# EAGLE board SWARMESH (EAGLE 9.4.2)
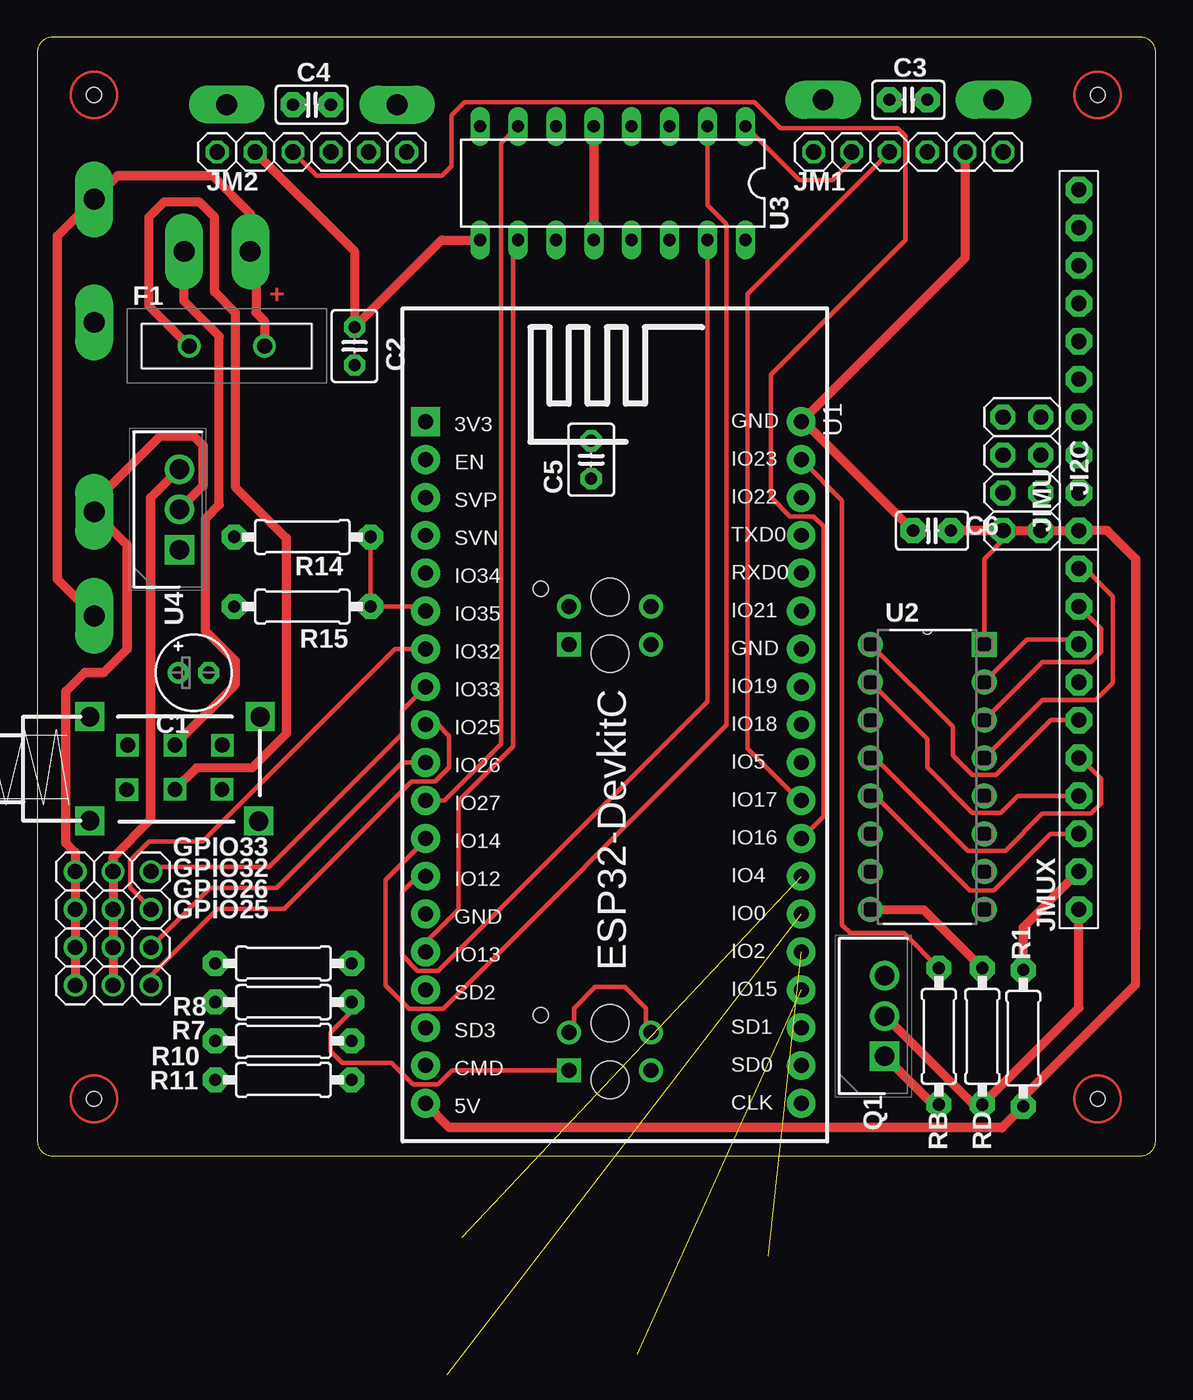
[diagram p0: board, top side]
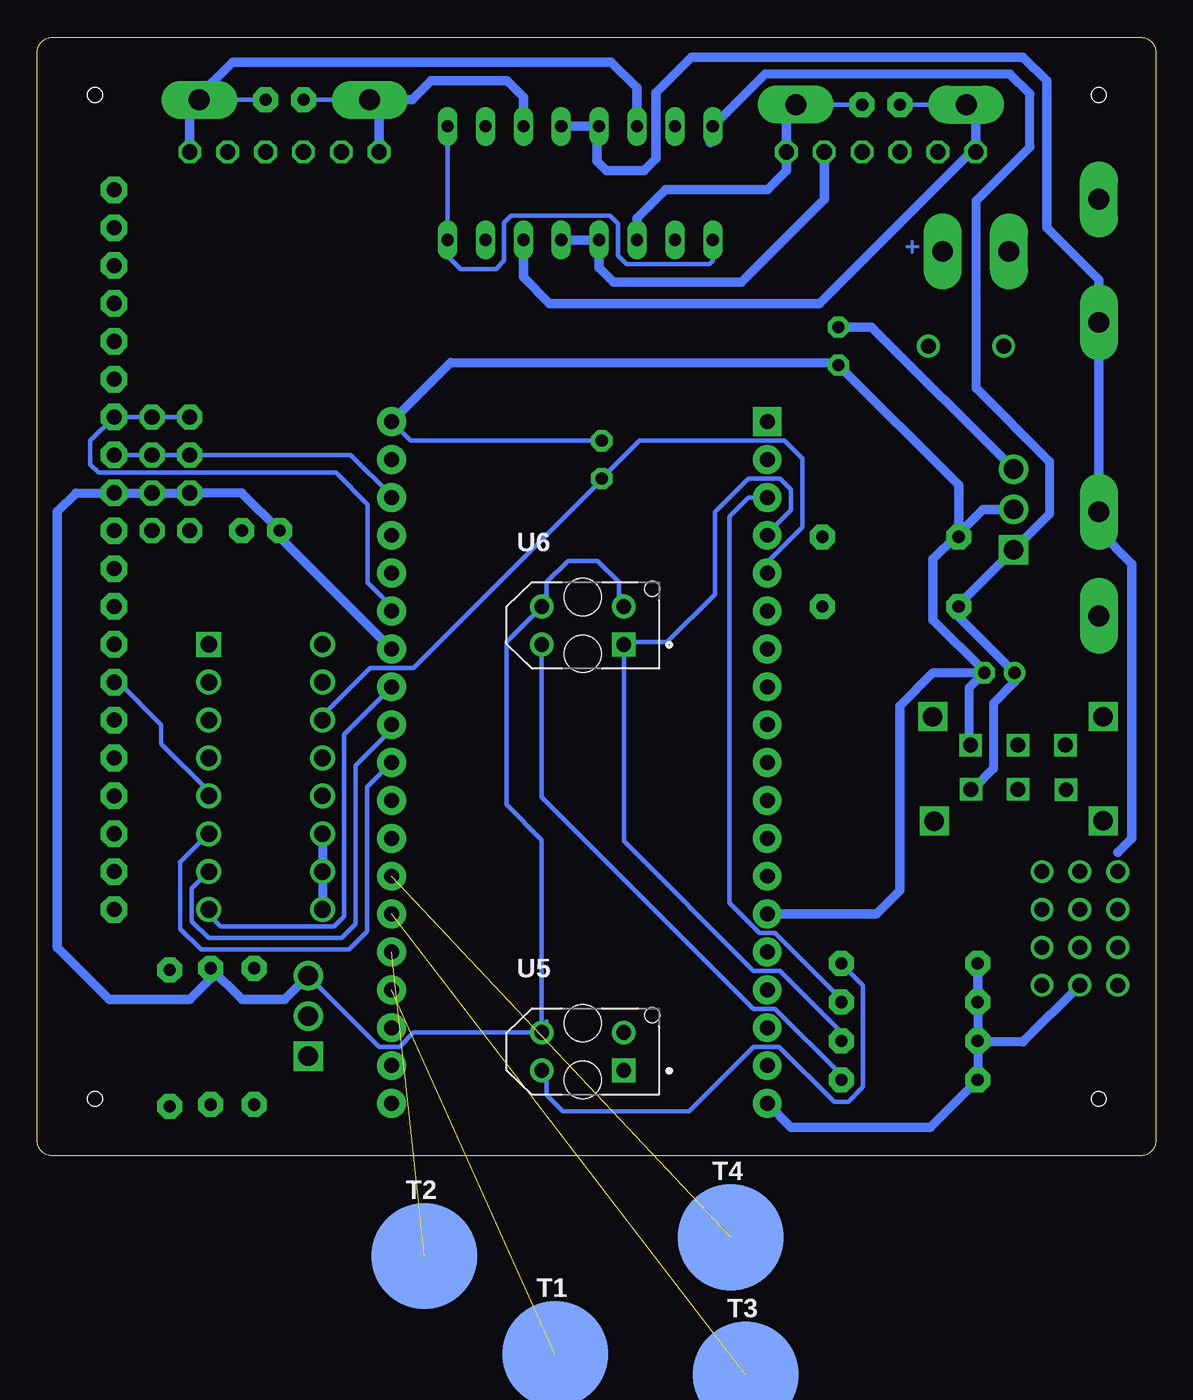
[diagram p1: board, bottom side, seen from below]

Size 75 x 75 mm. Coordinates in mm from the lower left corner, seen from the top.
Outline: 0,74 0,1 arc90 1,0 74,0 arc90 75,1 75,74 arc90 74,75 1,75 arc90 0,74
Copper layers (1*16): Top 0.035mm / dielectric 1.5mm / Bottom 0.035mm
Design rules "default *": minimum track width 6mil, minimum drill 0.35mm, track to track 6mil, track to pad 6mil, pad to pad 6mil, via to via 6mil, smd to smd 6mil, copper to edge 40mil, drill to drill 6mil, minimum pad ring 10mil, minimum via ring 8mil, stop-mask expansion 4mil, vias tented up to drill 0mil, thermal gap 10mil
Holes 1 mm at 3.81,3.81 71.12,3.81 71.12,71.12 3.81,71.12
tKeepout: area 0.9,0.9 to 6.7,6.7; area 68.3,1 to 74,6.6; area 0.9,68.2 to 6.7,74; area 68.2,68.2 to 74,74

## Footprints (pad centres in the part's own frame; a part is rotated, then mirrored left to right if it is on the bottom)
1X1-BIGPOGO = drill 1.4 pad 2.54 long: P$1 0,0
E2-5 = drill 0.813 pad 1.422: + -1.016,0 | drill 0.813 pad 1.422 octagon: - 1.016,0
C025-030X050 = drill 0.813 pad 1.422 octagon: 1 -1.27,0; 2 1.27,0
C025-025X050 = drill 0.813 pad 1.676 octagon: 1 -1.27,0; 2 1.27,0
RUEF300K2 = drill 1.01 pad 1.515: 1 0,0; 2 5.05,0
1X03 = drill 1.016: 1 -2.54,0; 2 0,0; 3 2.54,0
2X04 = drill 1.016 pad 1.676 octagon: 1 -3.81,-1.27; 2 -3.81,1.27; 3 -1.27,-1.27; 4 -1.27,1.27; 5 1.27,-1.27; 6 1.27,1.27; 7 3.81,-1.27; 8 3.81,1.27
1X10-BIG = drill 1.016 pad 1.778 octagon: 1 -11.43,0; 2 -8.89,0; 3 -6.35,0; 4 -3.81,0; 5 -1.27,0; 6 1.27,0; 7 3.81,0; 8 6.35,0; 9 8.89,0; 10 11.43,0
1X06 = drill 1.016 octagon: 1 -6.35,0; 2 -3.81,0; 3 -1.27,0; 4 1.27,0; 5 3.81,0; 6 6.35,0
TO270P460X1020X2008-3P = drill 1.32 pad 1.98 square: 1 0,0 | drill 1.32 pad 1.98: 2 2.7,0; 3 5.4,0
0207/9 = drill 0.813 pad 1.676 octagon: 1 -4.572,0; 2 4.572,0
PS22F03 = drill 1.3 square: 0 -3.175,5.715; 1 3.835,5.613; 2 3.81,-5.715; 3 -3.175,-5.715 | drill 1 square: C1 -1.27,0; C2 1.702,0; NC1 -1.27,-3.175; NC2 1.727,-3.226; NO1 -1.27,3.175; NO2 1.702,3.15
SPRING-CONNECTOR = smd 7.112 x 7.112: P$2 0,0
ESP32-DEVKITC = drill 1 pad 1.93 square: 1 -0.01,0.01 | drill 1 pad 1.93: 2 2.53,0.01; 3 5.07,0.01; 4 7.61,0.01; 5 10.15,0.01; 6 12.69,0.01; 7 15.23,0.01; 8 17.77,0.01; 9 20.31,0.01; 10 22.85,0.01; 11 25.39,0.01; 12 27.93,0.01; 13 30.47,0.01; 14 33.01,0.01; 15 35.55,0.01; 16 38.09,0.01; 17 40.63,0.01; 18 43.17,0.01; 19 45.71,0.01; 20 45.71,25.2; 21 43.17,25.2; 22 40.63,25.2; 23 38.09,25.2; 24 35.55,25.2; 25 33.01,25.2; 26 30.47,25.2; 27 27.93,25.2; 28 25.39,25.2; 29 22.85,25.2; 30 20.31,25.2; 31 17.77,25.2; 32 15.23,25.2; 33 12.69,25.2; 34 10.15,25.2; 35 7.61,25.2; 36 5.07,25.2; 37 2.53,25.2; 38 -0.01,25.2
CD4051BEE4DIP = drill 1.118: 1 -3.81,8.89; 2 -3.81,6.35; 3 -3.81,3.81; 4 -3.81,1.27; 5 -3.81,-1.27; 6 -3.81,-3.81; 7 -3.81,-6.35; 8 -3.81,-8.89; 9 3.81,-8.89; 10 3.81,-6.35; 11 3.81,-3.81; 12 3.81,-1.27; 13 3.81,1.27; 14 3.81,3.81; 15 3.81,6.35 | drill 1.118 square: 16 3.81,8.89
DIL16 = drill 0.813 long: 1 -8.89,-3.81; 2 -6.35,-3.81; 3 -3.81,-3.81; 4 -1.27,-3.81; 5 1.27,-3.81; 6 3.81,-3.81; 7 6.35,-3.81; 8 8.89,-3.81; 9 8.89,3.81; 10 6.35,3.81; 11 3.81,3.81; 12 1.27,3.81; 13 -1.27,3.81; 14 -3.81,3.81; 15 -6.35,3.81; 16 -8.89,3.81
XDCR_TCRT5000L = drill 1 pad 1.6 square: 1 -2.75,1.27 | drill 1 pad 1.6: 2 -2.75,-1.27; 3 2.75,-1.27; 4 2.75,1.27 | hole 2.5: 0,1.9; 0,-1.9 | hole 1: -4.65,-2.45

## Placement (x,y rotation side)
BAT+  [1X1-BIGPOGO]  3.81,64.14 90 top
BAT-  [1X1-BIGPOGO]  9.84,60.64 90 top
C1  10uF  [E2-5]  10.48,32.38 0 top
C2  [C025-030X050]  21.27,54.29 270 top
C3  [C025-025X050]  58.42,70.8 0 top
C4  [C025-025X050]  18.41,70.48 0 top
C5  [C025-030X050]  37.15,46.67 90 top
C6  [C025-025X050]  60.01,41.91 180 top
CHG1+  [1X1-BIGPOGO]  3.81,36.2 270 top
CHG1-  [1X1-BIGPOGO]  3.81,43.18 270 top
CHG2+  [1X1-BIGPOGO]  14.29,60.64 270 bottom
CHG2-  [1X1-BIGPOGO]  3.81,55.88 270 top
F1  RUEF300K-2  [RUEF300K2]  15.24,54.29 180 top
GPIO25  [1X03]  5.08,11.43 180 top
GPIO26  [1X03]  5.08,13.97 180 top
GPIO32  [1X03]  5.08,16.51 180 top
GPIO33  [1X03]  5.08,19.05 180 top
JI2C  [2X04]  66.04,45.72 90 top
JIMU  PINHD-1X10  [1X10-BIG]  69.85,53.34 90 top
JM1  [1X06]  58.42,67.31 0 top
JM2  [1X06]  18.41,67.31 0 top
JMUX  PINHD-1X10  [1X10-BIG]  69.85,27.94 270 top
JP1  [1X1-BIGPOGO]  52.7,70.8 180 top
JP2  [1X1-BIGPOGO]  64.14,70.8 180 top
JP3  [1X1-BIGPOGO]  24.13,70.48 0 top
JP4  [1X1-BIGPOGO]  12.7,70.48 180 top
Q1  TIP122  [TO270P460X1020X2008-3P]  56.83,6.67 90 top
R1  220  [0207/9]  66.12,7.88 270 top
R7  1k  [0207/9]  16.51,10.3 0 top
R8  100  [0207/9]  16.51,12.9 180 top
R10  1k  [0207/9]  16.51,7.69 0 top
R11  100  [0207/9]  16.51,5.08 180 top
R14  10k  [0207/9]  17.78,41.5 0 top
R15  47k  [0207/9]  17.78,36.83 180 top
RB  1k  [0207/9]  60.46,8 90 top
RD  0  [0207/9]  63.37,8 90 top
S1  [PS22F03]  9.23,26.27 270 top
T1  [SPRING-CONNECTOR]  40.27,-13.31 0 bottom  (outside the outline)
T2  [SPRING-CONNECTOR]  49.03,-6.74 0 bottom  (outside the outline)
T3  [SPRING-CONNECTOR]  27.49,-14.68 0 bottom  (outside the outline)
T4  [SPRING-CONNECTOR]  28.49,-5.47 0 bottom  (outside the outline)
U1  ESP32DEVKITC  [ESP32-DEVKITC]  26.04,49.21 270 top
U2  CD4051BEE4  [CD4051BEE4DIP]  59.69,25.4 0 top
U3  L293D  [DIL16]  38.59,65.22 180 top
U4  L7805CV-DG  [TO270P460X1020X2008-3P]  9.53,40.64 90 top
U5  TCRT5000L  [XDCR_TCRT5000L]  38.42,6.99 180 bottom
U6  TCRT5000L  [XDCR_TCRT5000L]  38.42,35.56 180 bottom

## Library data of the parts
BAT+ BAT- C1-C6 CHG1+ CHG1- CHG2+ CHG2- GPIO25 GPIO26 GPIO32 GPIO33 JI2C JIMU JM1 JM2 JMUX JP1-JP4 R1 R7 R8 R10 R11 R14 R15 RB RD = adafruit
F1 = RUEF300K-2; DESCRIPTION: TE CONNECTIVITY / RAYCHEM - RUEF300K-2 - RESETTABLE FUSE, PTC, 30V, 3A, RADIAL; HEIGHT: 16.5mm; MANUFACTURER_NAME: TE CONNECTIVITY / RAYCHEM; MANUFACTURER_PART_NUMBER: RUEF300K-2
Q1 = TIP122; DESCRIPTION: TIP122, Darlington Transistor, NPN 8 A 100 V HFE:1000, 3-Pin, TO-220; HEIGHT: 4.6mm; MANUFACTURER_NAME: STMicroelectronics; MANUFACTURER_PART_NUMBER: TIP122; MOUSER_PART_NUMBER: 511-TIP122; MOUSER_PRICE-STOCK: https://www.mouser.com/Search/Refine.aspx?Keyword=511-TIP122
S1 = ArduinoNano LearningBot 4-21-18
T1-T4 = SparkFun-Connectors; SF_ID: PRT-11822
U1 = ESP32-DEVKITC (1)
U2 = CD4051BEE4
U3 = st-microelectronics; MPN: L293D; OC_FARNELL: 9589619; OC_NEWARK: 56P8249
U4 = L7805CV-DG; ALLIED_NUMBER: 70390055; ALLIED_PRICE-STOCK: http://www.alliedelec.com/stmicroelectronics-l7805cv-dg/70390055/; DESCRIPTION: Voltage Regulator 5V 4% 1.5A TO220 L7805CV-DG, Linear Voltage Regulator, Current Limit, Shut-Down 1.5A 5 V, 3-Pin TO220; HEIGHT: 4.6mm; MANUFACTURER_NAME: STMicroelectronics; MANUFACTURER_PART_NUMBER: L7805CV-DG; MOUSER_PART_NUMBER: 511-L7805CV-DG; MOUSER_PRICE-STOCK: https://www.mouser.com/Search/Refine.aspx?Keyword=511-L7805CV-DG; RS_PART_NUMBER: 7931346P; RS_PRICE-STOCK: http://uk.rs-online.com/web/p/products/7931346P
U5 U6 = TCRT5000L; AVAILABILITY: Unavailable; DESCRIPTION: TCRT5000 Series 940 nm 100 mA 60 mA Transistor Output Reflective Optical Sensor; MF: Vishay Semiconductor; MP: TCRT5000L; PACKAGE: PCB Mount Vishay; PRICE: None

## Nets
ADCMX: C5.1 U1.5 U2.3
ADO: JIMU.7
BATLVL: R14.2 R15.1 U1.6
E1A: JM1.3 U1.28
E1B: JM1.4
E2A: JM2.3 U1.27
E2B: JM2.4
ECL: JIMU.6
EDA: JIMU.5
FSY: JIMU.10
GND: C1.- C2.2 C5.2 C6.2 CHG1-.P$1 CHG2-.P$1 GPIO25.3 GPIO26.3 GPIO32.3 GPIO33.3 JI2C.3 JI2C.4 JIMU.2 JM1.5 JM2.5 Q1.3 R14.1 RD.2 S1.NO1 U1.14 U1.32 U1.38 U2.6 U2.7 U2.8 U3.4 U3.5 U3.12 U3.13 U4.2 U5.2 U5.3 U6.2 U6.3
INT: JIMU.8
IO5: U1.29 U2.11
IO12: U1.13 U3.15
IO13: U1.15 U3.10
IO14: U1.12 U3.2
IO25: GPIO25.1 U1.9
IO26: GPIO26.1 U1.10
IO27: U1.11 U3.7
IO32: GPIO32.1 U1.7
IO33: GPIO33.1 U1.8
IR1: R7.2 U1.3 U5.1
IR2: R10.2 U1.4 U6.1
IRTX: RB.2 U1.37
M1A: C3.1 JM1.1 JP1.P$1 U3.3
M1B: C3.2 JM1.6 JP2.P$1 U3.6
M2A: C4.1 JM2.1 JP4.P$1 U3.14
M2B: C4.2 JM2.6 JP3.P$1 U3.11
N$1: Q1.1 RB.1
N$2: F1.2 S1.C2
N$3: BAT-.P$1 S1.C1
N$5: JMUX.6 U2.4
N$7: U1.30 U2.10
N$8: U1.31 U2.9
N$9: R11.1 U6.4
N$10: R8.1 U5.4
N$11: JMUX.5 U2.1
N$13: JMUX.7 U2.2
N$14: JMUX.8 U2.5
N$15: BAT+.P$1 CHG1+.P$1 CHG2+.P$1 F1.1
N$16: JMUX.9 R1.1
N$17: JMUX.10 Q1.2 RD.1
N$19: JMUX.1 U2.13
N$20: JMUX.2 U2.14
N$21: JMUX.4 U2.12
N$22: JMUX.3 U2.15
NCS: JIMU.9
SCL: JI2C.5 JI2C.6 JIMU.3 U1.36
SDA: JI2C.7 JI2C.8 JIMU.4 U1.33
TOUCH1: T1.P$2 U1.23
TOUCH2: T2.P$2 U1.24
TOUCH3: T3.P$2 U1.25
TOUCH4: T4.P$2 U1.26
V+: C1.+ R15.2 S1.NO2 U3.8 U4.1
VCC: C2.1 C6.1 GPIO25.2 GPIO26.2 GPIO32.2 GPIO33.2 JI2C.1 JI2C.2 JIMU.1 JM1.2 JM2.2 R1.2 R7.1 R8.2 R10.1 R11.2 U1.19 U2.16 U3.1 U3.9 U3.16 U4.3

## Tracks (layer width: path | path; a pad name or v marks a point on that pad's centre or on a via)
ADCMX
  Bottom 0.305: U2.3 55.88,29.53 52.7,32.71 49.76,32.71 37.15,45.32 C5.1 34.6,47.95 24.88,47.95 23.68,46.75 23.68,42.17 26.05,39.81 U1.5
BATLVL
  Top 0.305: R14.2 R15.1 25.74,36.83 U1.6
E1A
  Top 0.305: U1.28 51.12,23.82 47.62,27.32 47.62,57.78 JM1.3
E2A
  Top 0.305: JM2.3 18.73,65.73 27.15,65.73 27.78,66.36 27.78,69.77 28.66,70.65 48.09,70.65 49.83,68.91 57.69,68.91 58.22,68.39 58.22,61.38 49.2,52.37 49.2,44.16 50.49,42.87 50.71,42.87 52.06,42.87 52.7,42.23 52.7,22.86 52.7,22.75 U1.27
GND
  Top 0.305: 41.15,36.84 U6.3 | 35.68,36.84 U6.2 | U5.2 36,8.59 36,9.89 37.42,11.3 39.42,11.3 40.84,9.89 40.84,8.59 U5.3
  Top 0.61: C6.2 51.42,49.22 U1.38 62.23,60.22 JM1.5 | U2.8 59.43,16.51 RD.2 | 2.54,20.32 GPIO33.3 GPIO32.3 GPIO26.3 GPIO25.3
  Top 0.635: U3.5 U3.12 | U4.2 11.11,44.93 11.11,47.62 10.48,48.26 8.26,48.26 3.81,43.81 CHG1-.P$1 6.03,40.96 6.03,33.97 4.45,32.38 3.17,32.38 1.91,31.11 1.91,20.95 2.54,20.32
  Bottom 0.305: U5.3 41.27,8.26 | 41.27,8.26 41.59,8.26 40.84,9.01 | 41.15,8.3 41.23,8.3 41.27,8.26 | 35.68,8.27 U5.2 36,8.59 | U6.2 36,37.16 36,38.46 37.42,39.88 39.42,39.88 40.84,38.46 40.84,37.16 U6.3 41.17,36.8 43.54,34.43 43.54,23.56 41.17,21.18 U5.3 | U1.38 49.97,47.95 37.16,47.95 C5.2 | 56.82,12.07 Q1.3 52.08,7.31 50.71,7.31 49.77,8.26 U5.3
  Bottom 0.61: 17.14,30.16 14.92,32.38 C1.- | C1.- 12.51,31.37 12.51,27.64 S1.NO1 | U1.32 58.74,41.48 C6.2 61.28,44.45 JI2C.4 JI2C.3 JIMU.2 72.39,44.45 | U1.38 47.27,53.19 21.43,53.19 C2.2 | 14.92,35.92 11.49,32.5 C1.- | U2.6 U2.7 U2.8
  Bottom 0.635: Q1.3 58.42,10.48 61.27,10.48 RD.2 63.37,11.88 64.77,10.48 70.17,10.48 73.66,13.97 73.66,43.18 72.39,44.45 | U1.14 18.74,16.2 17.14,17.8 17.14,30.16 | U3.4 37.47,69.03 | 37.47,69.03 U3.5 | U3.13 U3.12 37.32,59.55 36.35,58.57 27.79,58.57 22.23,64.14 JM2.5 | U4.2 11.59,43.34 13.21,41.72 R14.1 | R14.1 13.21,44.96 C2.2 | 14.92,35.92 14.92,40.01 13.43,41.5 R14.1 | 2.54,20.32 1.59,21.27 1.59,39.69 3.81,41.91 CHG1-.P$1 CHG2-.P$1 3.81,58.74 7.3,62.23 7.3,72.07 8.89,73.66 31.11,73.66 33.5,71.27 33.5,66.85 34.31,66.04 36.83,66.04 37.47,66.67 37.47,69.03
  pour Bottom: 54.29,16.51
IO5
  Bottom 0.305: U1.29 52.87,24.73 52.87,15.02 54.08,13.82 64.02,13.82 65.42,15.21 65.42,19.7 63.53,21.59 U2.11
IO12
  Top 0.305: U3.15 44.94,30.44 35.82,21.33 35.66,21.17 26.89,12.39 25.52,12.39 24.46,13.45 24.46,17.68 25.52,18.74 U1.13
IO13
  Top 0.305: U1.15 26.05,14.3 28.26,16.51 28.26,23.78 31.92,27.45 31.92,61.09 U3.10
IO14
  Top 0.305: U3.2 44.94,63.75 46.22,62.47 46.22,28.87 27.21,9.85 24.94,9.85 23.36,11.43 23.36,18.49 26.05,21.17 U1.12
IO25
  Top 0.305: GPIO25.1 7.62,12.06 12.1,16.55 16.57,16.55 25.12,25.09 26.69,25.09 27.63,26.04 27.63,28.16 26.89,28.9 U1.9
IO26
  Top 0.305: GPIO26.1 11.61,17.96 16.06,17.96 24.47,26.36 U1.10
IO27
  Top 0.305: U3.7 31.11,67.9 31.11,27.62 27.3,23.81 U1.11
IO32
  Top 0.305: GPIO32.1 7.62,16.59 6.24,17.97 6.24,19.81 7.5,21.07 11.1,21.07 24.01,33.98 U1.7
IO33
  Top 0.305: GPIO33.1 7.94,19.37 15.56,19.37 24.46,28.27 24.46,29.86 U1.8
IR1
  Top 0.305: R7.2 21.08,9.66 19.68,8.26 19.68,6.99 20.44,6.22 23.75,6.22 25.2,4.77 26.89,4.77 27.83,5.71 U5.1
  Bottom 0.305: R7.2 21.08,10.5 25.52,14.93 26.57,14.93 28.57,16.94 28.57,42.86 27.3,44.14 U1.3
IR2
  Bottom 0.305: R10.2 21.08,8.27 25.2,12.39 26.96,12.39 35.67,21.1 U6.1 35.52,34.44 32.76,34.44 29.56,37.64 29.56,43.16 27.31,45.41 25.2,45.41 24.46,44.67 24.46,43.3 26.05,41.71 U1.4
IRTX
  Top 0.305: U1.37 53.98,43.94 53.98,15.49 54.54,14.92 58.11,14.92 RB.2
M1A
  Bottom 0.305: C3.1 JP1.P$1
  Bottom 0.635: JM1.1 52.07,70.17 JP1.P$1 49.85,70.8 48.58,72.07 43.5,72.07 42.4,70.97 U3.3
M1B
  Bottom 0.305: 64.45,70.8 C3.2
  Bottom 0.635: U3.6 34.78,71.61 36.51,73.34 61.91,73.34 64.45,70.8 JP2.P$1 64.77,70.17 JM1.6
M2A
  Bottom 0.305: C4.1 JP4.P$1
  Bottom 0.635: JP4.P$1 12.06,69.85 JM2.1 12.38,67.31 22.54,57.15 40.64,57.15 42.4,58.91 U3.14
M2B
  Bottom 0.305: JP3.P$1 C4.2
  Bottom 0.635: 25.08,67.63 JM2.6 | U3.11 34.78,62.87 32.88,64.77 26.04,64.77 24.77,66.04 JM2.6 | JM2.6 24.77,69.85 JP3.P$1
N$1
  Top 0.61: RB.1 60.07,3.43 Q1.1
N$2
  Top 0.61: F1.2 7.48,56.99 7.48,62.95 8.49,63.96 10.88,63.96 11.89,62.95 11.89,57.93 13.28,56.54 13.28,44.84 16.7,41.43 16.7,28.28 14.43,26.01 10.67,26.01 S1.C2
N$3
  Top 0.61: BAT-.P$1 9.84,57.31 12.21,54.95 12.21,43.65 11.29,42.74 11.29,35.19 13.3,33.19 13.3,31.61 S1.C1
N$5
  Top 0.305: U2.4 56.17,26.67 62.39,20.45 64.93,20.45 67.42,22.94 70.66,22.94 71.36,23.64 71.36,25.26 69.95,26.67 JMUX.6
N$7
  Bottom 0.305: U1.30 51.23,28.59 53.65,26.18 53.65,15.53 54.58,14.59 63.52,14.59 64.64,15.72 64.64,17.91 U2.10
N$8
  Bottom 0.305: U1.31 54.42,28.26 54.42,16.04 55.09,15.37 62.7,15.37 63.5,16.16 U2.9
N$9
  Bottom 0.305: R11.1 21.08,5.42 25.52,9.85 26.97,9.85 41.17,24.05 U6.4
N$10
  Bottom 0.305: U5.4 40.84,5.38 40.84,4.08 39.74,2.98 31.29,2.98 26.96,7.31 25.25,7.31 21.55,3.62 20.61,3.62 19.62,4.61 19.62,11.4 21.08,12.87 R8.1
N$11
  Top 0.305: JMUX.5 67.97,29.21 64.29,25.53 62.71,25.53 61.4,26.83 61.4,28.77 U2.1
N$13
  Top 0.305: U2.2 59.68,27.95 59.68,26.02 62.71,22.99 64.61,22.99 65.75,24.13 JMUX.7
N$14
  Top 0.305: JMUX.8 67.94,21.59 64.14,17.78 62.55,17.78 56.2,24.13 U2.5
N$15
  Top 0.61: 14.29,63.18 CHG2+.P$1 15.24,59.69 14.99,59.44 14.95,59.44 14.68,59.17 14.68,56.54 15.24,55.97 F1.1
  Top 0.635: 14.29,63.18 11.75,65.72 5.4,65.72 BAT+.P$1 1.33,61.66 1.33,38.67 CHG1+.P$1
N$16
  Top 0.61: R1.1 66.12,15.32 JMUX.9
N$17
  Top 0.61: JMUX.10 69.85,9.91 RD.1 62.77,3.43 Q1.2
N$19
  Top 0.305: U2.13 67.39,30.56 70.98,30.56 72.14,31.71 72.14,37.5 70.27,39.37 JMUX.1
N$20
  Top 0.305: JMUX.2 71.36,35.32 71.36,33.8 70.66,33.1 68.58,33.1 67.39,33.1 U2.14
N$21
  Bottom 0.305: U2.12 63.5,24.45 66.67,27.62 66.67,28.89 69.53,31.75 JMUX.4
N$22
  Top 0.305: U2.15 66.36,34.61 70.17,34.61 70.48,34.29 JMUX.3
SCL
  Bottom 0.305: U1.36 51.23,44.25 53.98,46.99 JI2C.6 JI2C.5 JIMU.3
SDA
  Bottom 0.305: JI2C.8 JI2C.7 JIMU.4 71.44,47.94 71.44,46.35 70.88,45.8 54.98,45.8 52.83,43.65 52.83,38.44 51.23,36.84 U1.33
TOUCH1  (1 unrouted)
TOUCH2  (1 unrouted)
TOUCH3  (1 unrouted)
TOUCH4  (1 unrouted)
V+
  Bottom 0.61: U3.8 29.59,69.03 | U4.1 7.12,43.04 7.12,46.56 12.03,51.47 12.03,64.03 8.43,67.63 8.43,71.2 9.76,72.53 26.2,72.53 29.84,68.88 | S1.NO2 12.27,24.57 10.88,25.96 10.88,30.34 9.46,31.75 C1.+ 13.21,36.13 R15.2 13.21,36.96 U4.1 | U4.1 9.21,40.64
  Bottom 0.635: 29.84,67.94 29.84,68.88 U3.8
VCC
  Top 0.305: U3.1 51.1,65.41 53.34,65.41 54.61,66.67 JM1.2 | U2.16 63.5,40.01 64.77,41.27 JI2C.2
  Top 0.61: U3.9 27.12,61.41 C2.1 21.27,60.64 JM2.2 | 65.8,3.62 73.66,11.48 73.66,16.19 | JI2C.2 JI2C.1 JIMU.1 71.75,41.91 | GPIO33.2 GPIO32.2 GPIO26.2 GPIO25.2
  Top 0.635: U4.3 7.62,44.13 7.62,22.54 5.08,20 GPIO33.2 | 65.8,3.62 R1.2 64.69,1.87 64.69,1.92 27.63,1.92 U1.19 | 73.66,15.24 73.66,16.19 73.66,40.01 71.75,41.91 | JI2C.2 C6.1
  Bottom 0.305: U3.1 U3.16 47.48,60.34 46.61,59.46 44.22,59.46 43.68,60 43.68,62.58 43.23,63.03 36.6,63.03 36.06,62.49 36.06,60.35 35.5,59.78 29.93,59.78 29.7,60.02 U3.9
  Bottom 0.61: R7.1 R10.1 11.94,7.62 | 11.94,7.62 R11.2 | GPIO25.2 8.89,7.62 11.94,7.62
  Bottom 0.635: C2.1 19.05,55.56 U4.3 | R10.1 11.62,7.37 | R8.2 R7.1 | U1.19 24.45,1.91 15.11,1.91 R11.2
(copper drawn outside any net)
  shapes: Top circle x4

## Text on the board
Top: +
Bottom: +
Document: NYU Shanghai / Swarm Robotics / / Zander Mao / Sheldon Chen / Alison Yao / Thomas Yee / James Wu / Benny Yang / Rodolfo Cossovich / / 2019/06/25 | Licensing: Creative Commons ShareAlike 4.0 International - https://creativecommons.org/licenses/by-sa/4.0/ / You are welcome to use this library for commercial purposes. For attribution, we ask that when you reproduce our board, you email us with a link. / Acknowlewdgement: This project has been supported by NYU Shanghai Dean's Undergraduate Research Fund. | This IR reflective sensor should be standing in the front of the robot so we use it to detect obstacles. | Notes: tip122 and 7805 have no component body. / designators have different font size and are not aligned. / Switch designator missing. It seems that many footprints overlap silkscreen to solder pads. / Pin 1 should be indicated in any connector. Touch pads are too big and could have a hole to solder a cable. / Positive and negative pads for battery look the same (they should have slikscreen marks and different shape) / confirm if we can pass through holes of TCRT5000 / S1 has the wrong footprint (it's the middle contact the one that connects / battery pads can be moved around for better ground | Zander's update: / Changed TIP122&L7805CV footprint / Changed resister to PTH / Romain's Suggestions: leave the ground pin first, use ground plane to connect them later / / Rudi: what's the status on the above notes? / is switch footprint correct? I corrected the SCH with wrong connections to GND